# Altium PCB Ajchel_Jakub_plytka_gnd.PcbDoc
Units mm, origin at the board's own origin, x right, y up, seen from the top; angles counter-clockwise.
Board outline 81 x 76 mm, 2 copper layers (Top Layer, Bottom Layer); 80 components, 39 nets, 216 pads, 66 vias.
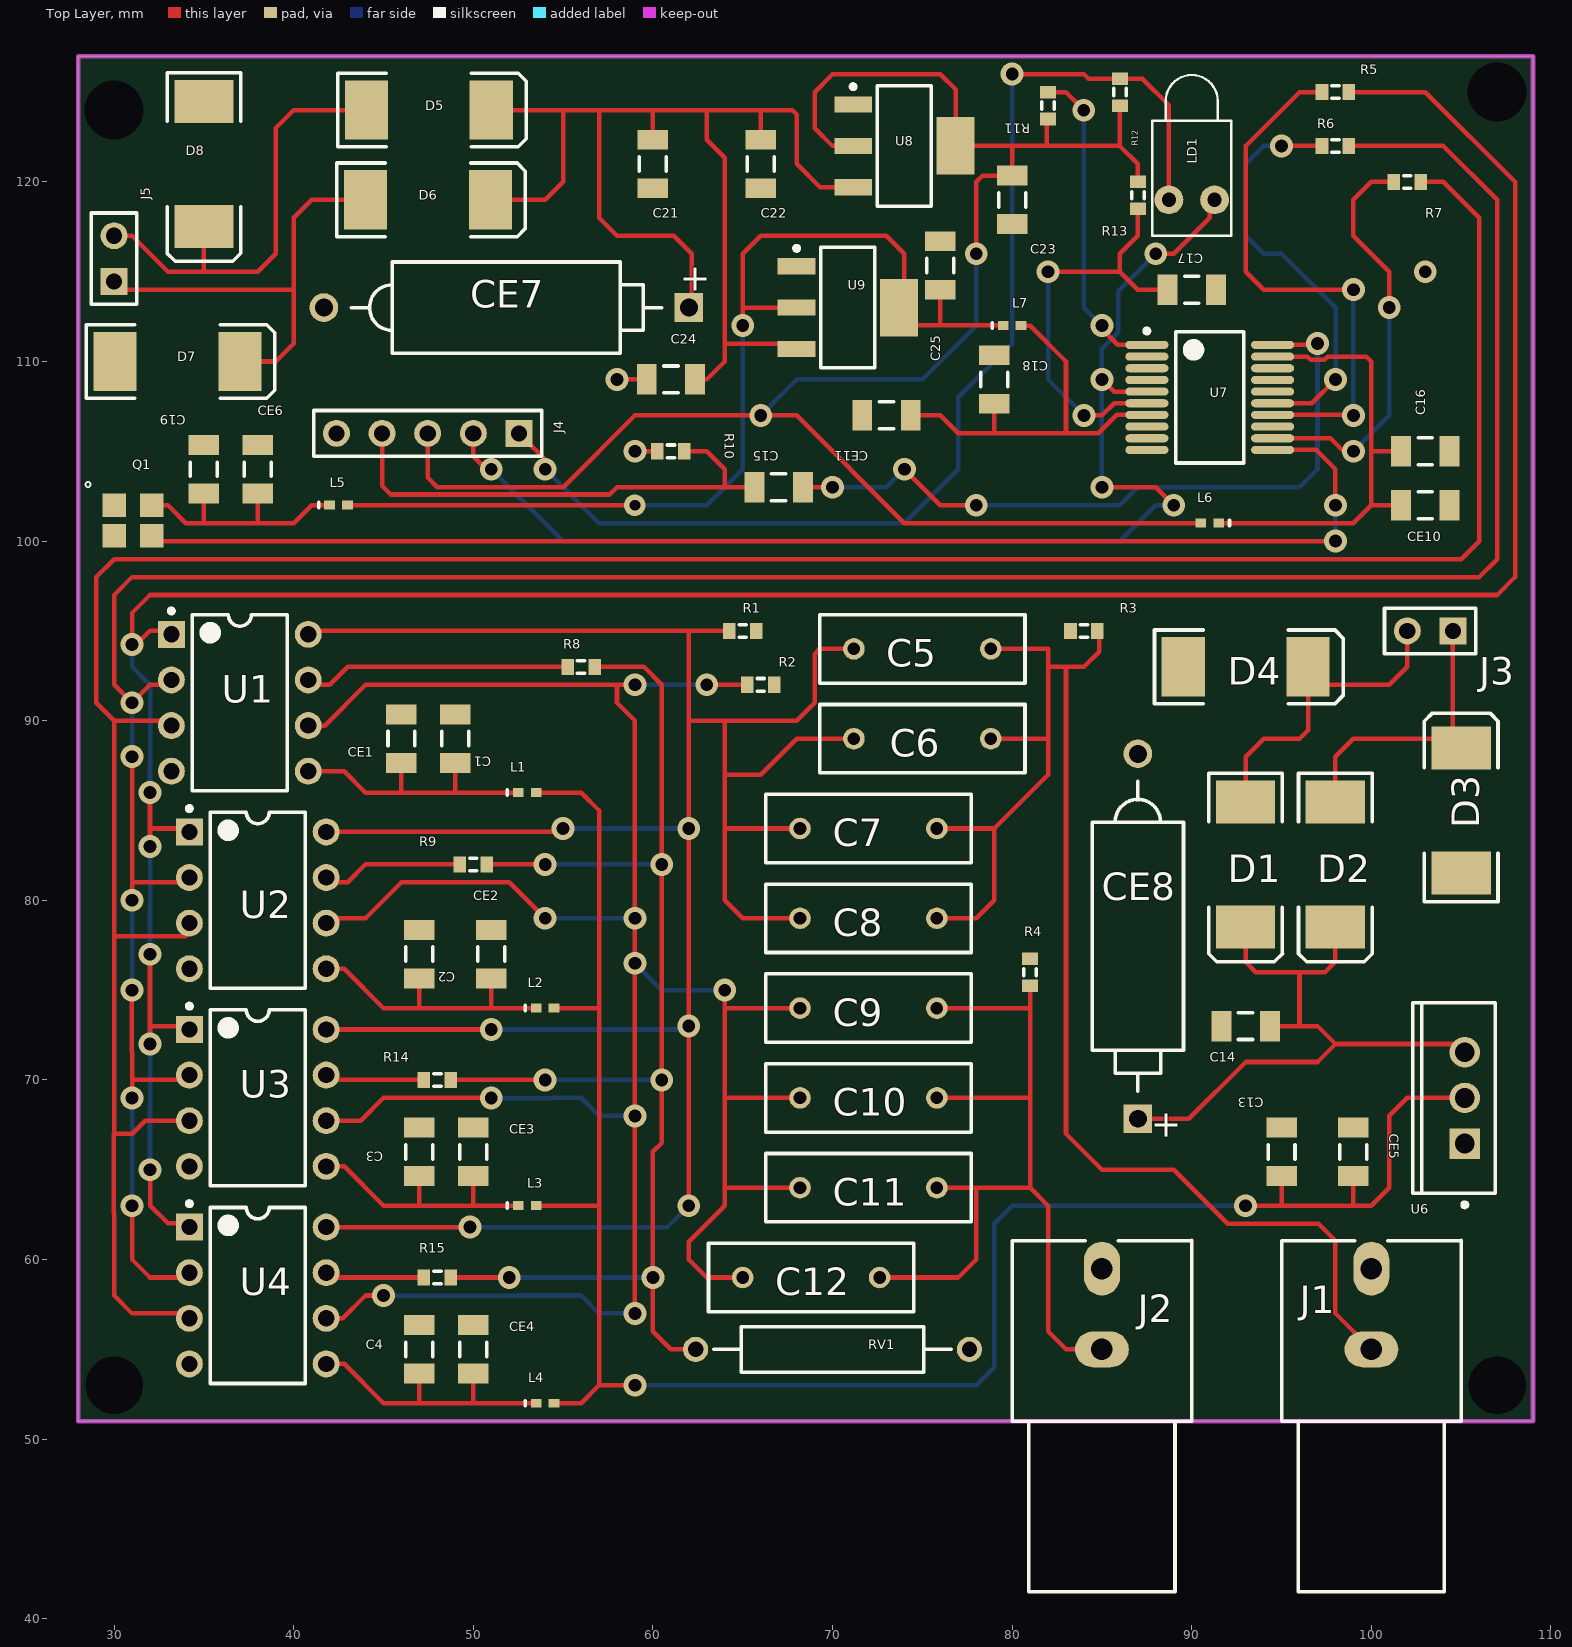
[diagram p0: Top Layer view]
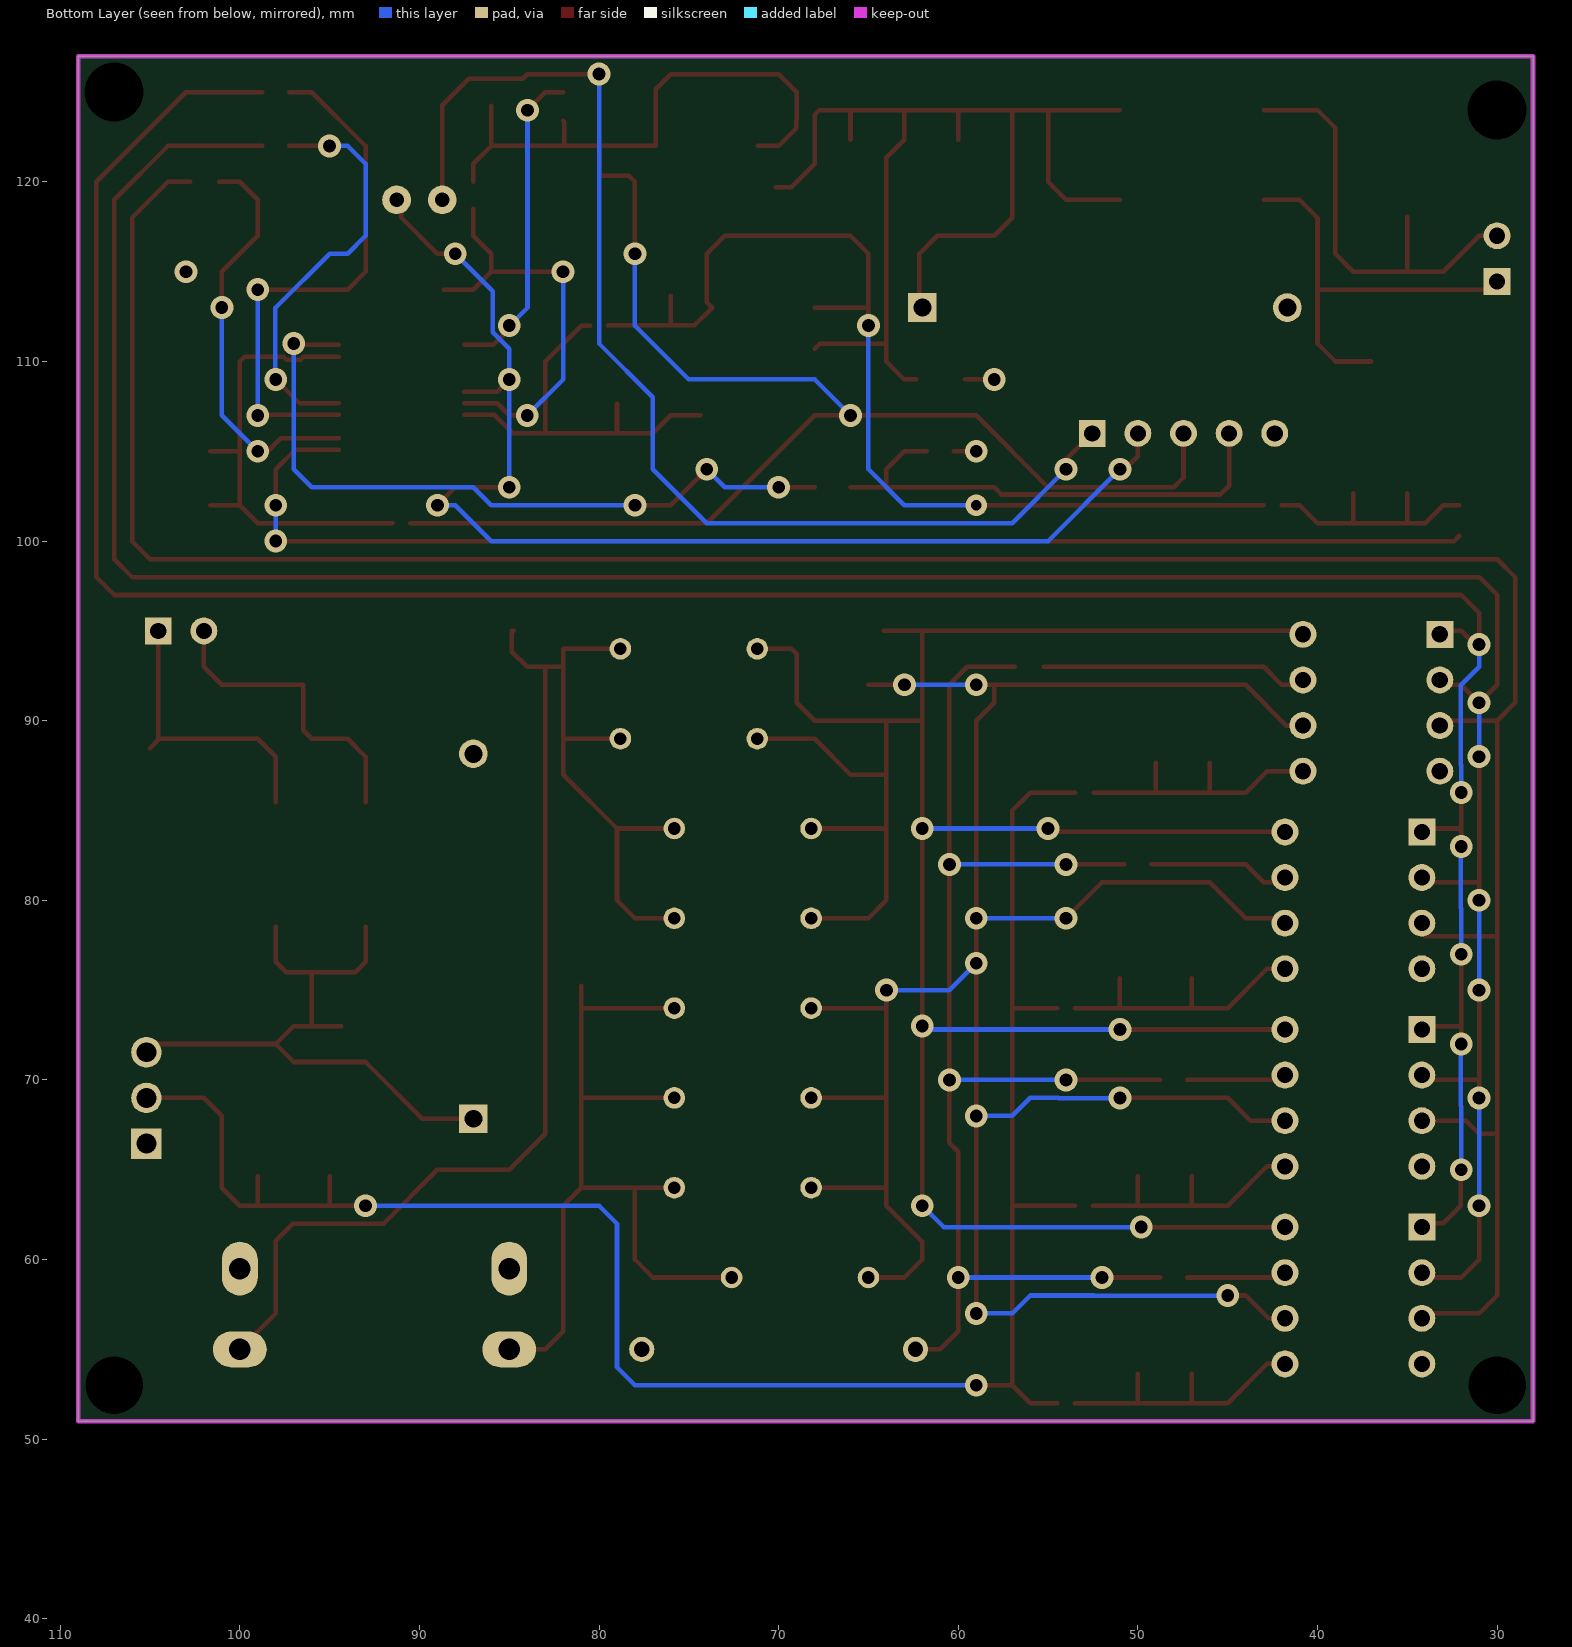
[diagram p1: Bottom Layer view, seen from below]

## Layer stack, top to bottom
Top Solder: solder mask 0.0102, Solder Resist, Dk 3.5
Top Layer: signal copper 0.0356
Dielectric 1: dielectric 0.32, FR-4, Dk 4.8
Bottom Layer: signal copper 0.0356
Bottom Solder: solder mask 0.0102, Solder Resist, Dk 3.5

## Board outline
28,51 28,127 109,127 109,51

## Design rules (kind name [scope] priority, off if disabled: settings)
Clearance [All] p1: gap=0.152 ignorepadtopadclearanceinfootprint=FALSE
HoleSize [All] p1: absolutevalues=TRUE maxlimit=10 minlimit=0.025 maxpercent=80.000 minpercent=20.000
MinimumSolderMaskSliver [All] p1: minsoldermaskwidth=0.051
PolygonConnect [All] p1: connectstyle=Relief reliefconductorwidth=0.254 reliefentries=4 polygonreliefangle="90 Angle" airgapwidth=0.254
RoutingVias [All] p1: holewidth=0.711 width=1.27 viastyle="Through Hole" minholewidth=0.711 minwidth=1.27 maxholewidth=0.711 maxwidth=1.27
SilkToSilkClearance [All] p1: silktosilkclearance=0
SilkToSolderMaskClearance [IsPad] p1: minsilkscreentomaskgap=0.025 clearancetoexposedcopper=TRUE
SolderMaskExpansion [All] p1: expansion=0
Width [All] p1: maxlimit=0.254 minlimit=0.254 preferedwidth=0.254
26 further rules are at their usual default settings.

## Components (designator, comment, footprint, x,y, rotation, side; value= is the part's Value field where it differs from the comment)
C1 "Comment" C1206 49,89 r270 top value=100nF
C2 "Comment" C1206 47,77 r270 top value=100nF
C3 "Comment" C1206 47,66 r270 top value=100nF
C4 "Comment" C1206 47,55 r270 top value=100nF
C5 "Comment" RAD-0.3 75,94 r0 top value=3.3uF
C6 "Comment" RAD-0.3 75,89 r0 top value=3.3uF
C7 "Comment" RAD-0.3 72,84 r0 top value=3.3uF
C8 "Comment" RAD-0.3 72,79 r0 top value=3.3uF
C9 "Comment" RAD-0.3 72,74 r0 top value=3.3uF
C10 "Comment" RAD-0.3 72,69 r0 top value=3.3uF
C11 "Comment" RAD-0.3 72,64 r0 top value=3.3uF
C12 "Comment" RAD-0.3 68.81,59 r0 top value=3.3uF
C13 "Comment" C1206 95,66 r270 top value=100nF
C14 "Comment" C1206 93,73 r0 top value=100nF
C15 "Comment" C1206 67,103 r180 top value=100nF
C16 "Comment" C1206 103,105 r180 top value=100nF
C17 "Comment" C1206 90,114 r180 top value=100nF
C18 "Comment" C1206 79,109 r270 top value=100nF
C19 "Comment" C1206 35,104 r270 top value=100nF
C21 "Comment" C1206 60,121 r90 top value=100nF
C22 "Comment" C1206 66,121 r90 top value=10uF
C23 "Comment" C1206 80,119 r90 top value=10uF
C24 "Comment" C1206 61,109 r0 top value=10uF
C25 "Comment" C1206 76,115.35 r270 top value=10uF
CE1 "Comment" C1206 46,89 r90 top value=10uF
CE2 "Comment" C1206 51,77 r90 top value=10uF
CE3 "Comment" C1206 50,66 r90 top value=10uF
CE4 "Comment" C1206 50,55 r90 top value=10uF
CE5 "Comment" C1206 99,66 r90 top value=10uF
CE6 "Comment" C1206 38,104 r90 top value=10uF
CE7 "Comment" POLAR0.8 51.84,113 r0 top value=1mF
CE8 "Comment" POLAR0.8 87,78 r270 top value=2.2mF
CE10 "Comment" C1206 103,102 r0 top value=10uF
CE11 "Comment" C1206 73,107 r180 top value=10uF
D1 "Comment" SMC 92.995,82 r270 top
D2 "Comment" SMC 97.995,82 r270 top
D3 "Comment" SMC 105,85 r90 top
D4 "Comment" SMC 93,93 r0 top
D5 "Comment" SMC 47.525,124 r0 top
D6 "Comment" SMC 47.475,119 r0 top
D7 "Comment" SMC 33.525,110 r0 top
D8 "Comment" SMC 35,121 r270 top
J1 "Comment" RCA/4.5-H2 100,51 r270 top
J2 "Comment" RCA/4.5-H2 85,51 r270 top
J3 "Comment" HDR1X2 104.54,95 r180 top
J4 "Comment" HDR1X5 52.54,106 r180 top
J5 "Comment" HDR1X2 30,114.46 r90 top
L1 "Comment" 0402-A 53,86 r0 top value=1uH
L2 "Comment" 0402-A 54,74 r0 top value=1uH
L3 "Comment" 0402-A 53,63 r0 top value=1uH
L4 "Comment" 0402-A 54,52 r0 top value=1uH
L5 "Comment" 0402-A 42.5,102 r0 top value=1uH
L6 "Comment" 0402-A 91,101 r180 top value=1uH
L7 "Comment" 0402-A 80,112 r0 top value=1uH
LD1 "Comment" LED-1 90,119 r90 top
Q1 "Comment" "CTS 403" 31.05,101.15 r0 top
R1 "Comment" J1-0603 65,95 r0 top value=560
R2 "Comment" J1-0603 66,92 r0 top value=560
R3 "Comment" J1-0603 84,95 r0 top value=220K
R4 "Comment" J1-0603 81,76 r270 top value=220K
R5 "Comment" J1-0603 98,125 r0 top value=33
R6 "Comment" J1-0603 98,122 r0 top value=33
R7 "Comment" J1-0603 102,120 r0 top value=33
R8 "Comment" J1-0603 56,93 r0 top value=10
R9 "Comment" J1-0603 50,82 r0 top value=10
R10 "Comment" J1-0603 61,105 r0 top value=75
R11 "Comment" J1-0603 82,124.25 r270 top value=10K
R12 "Comment" J1-0603 86,125 r270 top value=1K
R13 "Comment" J1-0603 87,119.25 r90 top value=10K
R14 "Comment" J1-0603 48,70 r0 top value=10
R15 "Comment" J1-0603 48,59 r0 top value=10
RV1 "Comment" AXIAL-0.6 70,55 r180 top value=2.2K
U1 "Comment" DIP8 37,91 r0 top
U2 "Comment" DIP8 38,80 r0 top
U3 "Comment" DIP8 38,69 r0 top
U4 "Comment" DIP8 38,58 r0 top
U6 "Comment" LT-T-3 105.2,69 r180 top
U7 "Comment" SSOP20_M 91,108 r0 top
U8 "Comment" MP04A_L 74,122 r0 top
U9 "Comment" MP04A_L 70.85,113 r0 top

## Footprints (in the part's own frame and the unit in brackets; to place one, negate y for a bottom-side part, rotate by r counter-clockwise, add the part's x,y. Pads: shape width x height; smd on the part's side, far side on the other; paste and mask are expansions set on the pad)
0402-A [mm] "Chip Inductor, Body 1.0x0.5mm, IPC High Density"
  rect 0.6x0.5 smd: 1(-0.5,0) 2(0.5,0)
  silkscreen extent -1.1,-0.15 -1.1,0.15, body extent -0.55,-0.3 0.55,0.3, height 0.55
AXIAL-0.6 [mm] "Axial Device, Thru-Hole; 2 Leads; 0.6 in Pin Spacing"
  round 1.4 hole 0.85: 1(-7.62,0) 2(7.62,0)
  silkscreen extent -6.6,-1.27 6.6,1.27
C1206 [mm] "Chip Capacitor, Body 3.2x1.6mm, IPC High Density"
  rect 1.1x1.7 smd: 1(-1.35,0) 2(1.35,0)
  silkscreen extent -0.4,-0.75 0.4,0.75, body extent -1.7,-0.9 1.7,0.9, height 1.3
"CTS 403" [mm]
  rect 1.3x1.3 smd: 1(-1.05,0.85) 2(-1.05,-0.85) 3(1.05,-0.85) 4(1.05,0.85)
  silkscreen extent -2.64,1.86 -2.36,2.14, body extent -1.6,-1.25 1.6,1.25, height 0.77
DIP8 [mm] "DIP, 8-Leads, Row Spacing 7.62mm, Pitch 2.54mm, Body 9.33x6.35mm"
  rect 1.5x1.5 hole 0.9: 1(-3.81,3.81)
  round 1.5 hole 0.9: 2(-3.81,1.27) 3(-3.81,-1.27) 4(-3.81,-3.81) 5(3.81,-3.81) 6(3.81,-1.27) 7(3.81,1.27) 8(3.81,3.81)
  silkscreen extent -3.93,-4.9 2.65,5.23, body extent -3.3,-4.9 3.3,4.9, height 5.08
HDR1X2 [mm] "Connector; Header; 2 Position"
  rect 1.5x1.5 hole 0.9: 1(0,0)
  round 1.5 hole 0.9: 2(2.54,0)
  silkscreen extent -1.27,-1.27 3.81,1.27
HDR1X5 [mm] "Connector; Header; 5 Position"
  rect 1.5x1.5 hole 0.9: 1(0,0)
  round 1.5 hole 0.9: 2(2.54,0) 3(5.08,0) 4(7.62,0) 5(10.16,0)
  silkscreen extent -1.27,-1.27 11.43,1.27
J1-0603 [mm] "Chip Resistor, Body 1.6x0.8mm, IPC High Density"
  rect 0.7x0.9 smd: 1(-0.75,0) 2(0.75,0)
  silkscreen extent -0.2,-0.35 0.2,0.35, body extent -0.85,-0.48 0.85,0.48, height 0.9
LED-1 [mm] "LED; 2 Leads"
  round 1.6 hole 0.8: 1(0,1.27) 2(0,-1.27)
  silkscreen extent -2,-2.2 6.95,2.2
LT-T-3 [mm] "T, 3-Leads, Body 10.55x4.6mm, Pitch 2.54mm"
  rect 1.7x1.7 hole 1.1: 1(0,2.54)
  round 1.7 hole 1.1: 2(0,0) 3(0,-2.54)
  silkscreen extent -1.7,-5.3 2.9,6.07, body extent -1.7,-5.28 2.9,5.28, height 22.15
MP04A_L [mm] "SOT223, 4-Leads, Body 6.5x3.5mm, Pitch 2.3mm, Lead Span 7mm, IPC High Density"
  rect 2.1x0.9 smd: 1(-2.85,2.3) 2(-2.85,0) 3(-2.85,-2.3)
  rect 2.1x3.2 smd: 4(2.85,0)
  silkscreen extent -2.97,-3.35 1.5,3.42, body extent -1.86,-3.35 1.86,3.35, height 1.8
POLAR0.8 [mm] "Polarized Capacitor; 2 Leads"
  rect 1.6x1.6 hole 1: 1(10.16,0)
  round 1.6 hole 1: 2(-10.16,0)
  silkscreen extent -8.64,-2.54 8.64,2.54
RAD-0.3 [mm] "Radial Cap, Thru-Hole; 2 Leads; 0.3 in Pin Spacing"
  round 1.2 hole 0.7: 1(-3.81,0) 2(3.81,0)
  silkscreen extent -5.71,-1.91 5.71,1.91
RCA/4.5-H2 [mm] "Two Conductor Jack (RCA), Right Angle, Thru-Hole, Body 10 x 10 x 13 mm (WxTxH)"
  oval 2x3 hole 1.2: 1A(-4,0)
  oval 3x2 hole 1.2: 2B(-8.496,0)
  silkscreen extent -10.07,-5 9.5,5
SMC [mm] "DO-214-AB/SMC; 2 C-Bend Leads; Body 7.9 x 5.9 mm, inc. leads (LxW)"
  rect 2.4x3.3 smd: 1(-3.475,0) 2(3.475,0)
  silkscreen extent -5.07,-2.05 5.43,2.05
SSOP20_M [mm] "SOP, 20-Leads, Body 7.2x5.29mm, Pitch 0.65mm, IPC Low Density"
  oval 2.4x0.45 smd: 1(-3.5,2.925) 2(-3.5,2.275) 3(-3.5,1.625) 4(-3.5,0.975) 5(-3.5,0.325) 6(-3.5,-0.325) 7(-3.5,-0.975) 8(-3.5,-1.625) 9(-3.5,-2.275) 10(-3.5,-2.925) 11(3.5,-2.925) 12(3.5,-2.275) 13(3.5,-1.625) 14(3.5,-0.975) 15(3.5,-0.325) 16(3.5,0.325) 17(3.5,0.975) 18(3.5,1.625) 19(3.5,2.275) 20(3.5,2.925)
  silkscreen extent -3.62,-3.65 1.9,3.82, body extent -2.69,-3.66 2.69,3.67, height 1.98

## Part data
C1 C2 C3 C4 C5 C6 C7 C8 C9 C10 C11 C12 C13 C14 C15 C16 C17 C18 C19 C21 C22 C23 C24 C25: library part Cap, "Capacitor", LatestRevisionDate=17-Jul-2002, LatestRevisionNote="Re-released for DXP Platform.", PackageDescription="Radial Cap, Thru-Hole; 2 Leads; 0.3 in Pin Spacing", PackageReference=RAD-0.3, Published=8-Jun-2000, Publisher="Altium Limited"
CE1 CE2 CE3 CE4 CE5 CE6 CE7 CE8 CE10 CE11: library part "Cap Pol2", "Polarized Capacitor (Axial)", LatestRevisionDate=17-Jul-2002, LatestRevisionNote="Re-released for DXP Platform.", PackageDescription="Polarized Capacitor; 2 Leads", PackageReference=POLAR0.8, Published=8-Jun-2000, Publisher="Altium Limited"
D1 D2 D3 D4 D5 D6 D7 D8: library part D-AK-2
J1 J2: library part RCA, "RCA Phono Jack, Right Angle, Thru-Hole, Snap-In", PackageDocument=7-Jul-2000, ComponentLink1Description="Manufacturer Link", ComponentLink1URL=http://www.mouser.com/kobiconn/, DatasheetDocument=7-Jul-2000, DrillAndSlotSize="Corresponds to nominal value.", LatestRevisionDate=15-Jul-2004, LatestRevisionNote="Component Replaced.", PackageReference=161, PCB_Layout="Complies with manufacturer's recommendation.", Published=15-Jul-2004, Publisher="Altium Limited"
J3 J5: library part "Header 2", "Header, 2-Pin", LatestRevisionDate=17-Jul-2002, LatestRevisionNote="Re-released for DXP Platform.", Publisher="Altium Limited"
J4: library part "Header 5", "Header, 5-Pin", LatestRevisionDate=17-Jul-2002, LatestRevisionNote="Re-released for DXP Platform.", Publisher="Altium Limited"
L1 L2 L3 L4 L5 L6 L7: library part Inductor, "Inductor", Code_IEC=1005, Code_JEITA=0402, LatestRevisionDate=29-May-2009, LatestRevisionNote="IPC-7351 Footprint Added.", PackageDescription="Chip Inductor", PackageReference=0402-A, Published=8-Jun-2000, Publisher="Altium Limited"
LD1: library part LED1, "Typical RED GaAs LED", LatestRevisionDate=08-Jul-2005, LatestRevisionNote="Mech Layer 1 removed.", PackageDescription="LED; 2 Leads", PackageReference=LED-1, Published=8-Jun-2000, Publisher="Altium Limited"
Q1: library part Oscilator12mhz, "Oscilator 12MHz", Supplier Part Number 1=1276649RL, HelpURL=https://www.tme.eu/pl/Document/96c4d9b8a8fd6040d2a0173ba011486f/cfps-39.pdf, Supplier 1=Farnell
R1 R2 R3 R4 R5 R6 R7 R8 R9 R10 R11 R12 R13 R14 R15: library part Res2, "Resistor", LatestRevisionDate=17-Jul-2002, LatestRevisionNote="Re-released for DXP Platform.", PackageDescription="Axial Device, Thru-Hole; 2 Leads; 0.4 in Pin Spacing", PackageReference=AXIAL-0.4, Published=8-Jun-2000, Publisher="Altium Limited"
RV1: library part "Res Adj2", "Variable Resistor", LatestRevisionDate=17-Jul-2002, LatestRevisionNote="Re-released for DXP Platform.", PackageDescription="Axial Device, Thru-Hole; 2 Leads; 0.6 in Pin Spacing", PackageReference=AXIAL-0.6, Published=8-Jun-2000, Publisher="Altium Limited", Set Position=0.5
U1 U2 U3 U4: library part TDA1543, "TDA1543"
U6: library part LT-LT1086-T-3
U7: library part WM8804
U8 U9: library part PM-REG-LM1086ADJ-SOT4

## Free pads (board coordinates)
  round 1.524 hole 3.3 unplated: 1(30,124) 4(107,125)
  round 1.524 hole 3.2 unplated: 2(30,53) 3(107,53)

## Via types
v1: diameter 1.27, hole 0.711, Top Layer to Bottom Layer, 65 vias
v2: diameter 1.2, hole 0.6, Top Layer to Bottom Layer, 1 vias

## Nets (pads, with @x,y where several pads share a name; then routed paths per layer and width w, separated by ;. In a path a pad name is that pad's centre, name@x,y a point inside that pad or via, vN(x,y) a via of type N, cw(c..) or ccw(c..) an arc to the next point about the centre after c; other vN are vias at no path point)
BCLK: R5.1 U7.14 | length 30.4
  Top Layer w0.254: U7.14 v1@99,107.025 ; R5.1 96,125 93,122 93,115 94,114 v1(99,114)
  Bottom Layer w0.254: v1(99,107) v1(99,114)
DOUT: R7.1 U7.12 | length 23
  Top Layer w0.254: U7.12 97.725,105.725 98.45,105 v1(99,105) ; v1(101,113) 101,115 99,117 99,119 100,120 R7.1@101.15,120
  Bottom Layer w0.254: v1(99,105) 101,107 v1(101,113)
GND: C1.1 C2.1 C3.1 C4.1 C13.1 C14.1 C16.1 C17.1 C18.1 C19.1 C21.1 C22.1 C23.1 C24.1 C25.1 CE1.2 CE2.2 CE3.2 CE4.2 CE5.2 CE6.2 CE7.2 CE8.2 CE10.2 CE11.2 D3.1 D4.1 D7.1 D8.1 J1.2B J2.2B J4.5 Q1.2 R1.2 R2.2 R3.1 R4.1 R10.1 RV1.1 U1.4 U2.4 U3.4 U4.4 U6.1 U7.2 U7.3 U7.4 U7.8 U8.1 U9.1 | length 2.9
  Top Layer w0.254: v1(58,109) C24.1 ; v1(59,105) 60.15,105 R10.1
LCA: J4.1 LD1.1 R12.1 | length 66.3
  Top Layer w0.254: J4.1 54.27,104.27 v1(54,104) ; v1(80,126) 84,126 84.25,125.75 R12.1 87.25,125.75 88.73,124.27 LD1.1
  Bottom Layer w0.254: v1(54,104) 57,101 74,101 77,104 77,108 80,111 v1(80,126)
LCK: J4.2 LD1.2 U7.5 | length 69.2
  Top Layer w0.254: J4.2 50,104.73 v1@50.73,104 ; v1(85,103) 88,103 v1(89,102) ; v1(85,109) 85.675,108.325 U7.5 ; v1(88,116) 89,116 91,118 91,118.73 LD1.2
  Bottom Layer w0.254: v1(51,104) 55,100 86,100 88,102 v1(89,102) ; v1(85,103) v1(85,109) 85,110.707 85.914,111.621 85.914,113.914 v1(88,116)
LRCK: R6.1 U7.15 | length 23.4
  Top Layer w0.254: U7.15 96.675,107.675 v1(98,109) ; v1(95,122) R6.1
  Bottom Layer w0.254: v1(95,122) 94,122 93,121 93,117 94,116 95,116 98.016,112.984 98.016,109.016 v1(98,109)
NetC1_2: C1.2 CE1.1 L1.1 U1.5 | length 17
  Top Layer w0.254: U1.5 42.81,87.19 44,86 50,86 51,86 L1.1@52.45,86 ; 46,86 CE1.1 ; 46.438,86 48,86 ; 49,86 C1.2
NetC2_2: C2.2 CE2.1 L2.1 U2.5 | length 15.9
  Top Layer w0.254: U2.5 42.81,76.19 45,74 47,74 ; C2.2 47,74 ; CE2.1 51,74 ; L2.1 51,74 ; 47,74 51,74
NetC3_2: C3.2 CE3.1 L3.1 U3.5 | length 14.9
  Top Layer w0.254: U3.5 42.81,65.19 45,63 47,63 ; C3.2 47,63 ; CE3.1 50,63 ; L3.1 50,63 ; 47,63 50,63
NetC4_2: C4.2 CE4.1 L4.1 U4.5 | length 15.9
  Top Layer w0.254: U4.5 42.81,54.19 45,52 47,52 ; C4.2 47,52 ; CE4.1 50,52 ; L4.1 50,52 ; 47,52 50,52
NetC5_1: C5.1 C6.1 C7.1 C8.1 R1.1 U1.8 U2.8 U3.8 U4.8 | length 156.3
  Top Layer w0.254: U1.8@41,95 R1.1@64.15,95 ; U4.8 v1(49.81,61.81) ; U3.8 v1(51,72.81) ; U2.8 v1@54.81,83.81 ; v1(62,63) v1(62,73) v1(62,84) 62,89 62,90 ; 62,95 62,94 62,90 ; 64,85 64,86 ; C8.1@67.851,79 C8.1 ; C8.1@68.021,79 65,79 64,80 64,81 64,82 64,83 64,84 ; C7.1 64,84 ; C6.1 68,89 66,87 64,87 ; C5.1 69.285,94 69,93.715 69,91 68,90 64,90 ; 62,90 64,90 ; 64,84 64,87 ; 64,87 64,89 64,90
  Bottom Layer w0.254: v1(49.81,61.81) 60.81,61.81 v1(62,63) ; v1(51,72.81) v1@61.81,72.81 ; v1(55,84) v1(62,84)
NetC5_2: C5.2 C6.2 C7.2 C8.2 J1.1A R3.2 | length 83.2
  Top Layer w0.254: C8.2 78,79 79,80 79,84 ; C7.2 79,84 ; C6.2 82,89 ; C5.2 82,94 82,92 82,89 ; 82,93 83,93 ; R3.2 84.85,95 84.85,93.85 84,93 83,93 ; J1.1A 98,57 98,61.057 97.057,62 92,62 89,65 85,65 83,67 83,93 ; 79,84 82,87 82,89
NetC9_1: C9.1 C10.1 C11.1 C12.1 R2.1 U1.6 U2.6 U3.6 U4.6 | length 157.7
  Top Layer w0.254: U1.6 41.73,89.73 44,92 46,92 58,92 ; U4.6 42.73,56.73 44,58 v1(45,58) ; U3.6 43.73,67.73 45,69 v1(51,69) ; U2.6@42.08,79 44,79 46,81 52,81 v1(54,79) ; v1(59,57) v1(59,68) v1(59,76.5) v1(59,79) 59,90 58.5,90.5 58,91 58,92 ; v1(59,92) 58,92 ; v1(63,92) R2.1@65,92 ; 64,65 64,68 ; 64,70 64,72 ; v1(64,75) 64,74 ; C12.1 63,59 62,60 62,61 64,63 64,64 ; C9.1@68,74 64,74 ; C11.1 64,64 ; C10.1 64,69 ; 64,64 64,69 ; 64,69 64,74
  Bottom Layer w0.254: v1(45,58) 45.016,57.984 52.421,57.984 52.437,58 56,58 57,57 v1(59,57) ; v1(51,69) 51.016,68.984 54.421,68.984 54.437,69 56,69 57,68 v1(59,68) ; v1(54,79) v1(59,79) ; v1(59,76.5) 60.5,75 v1(64,75) ; v1(59,92) v1(63,92)
NetC9_2: C9.2 C10.2 C11.2 C12.2 J2.1A R4.2 | length 48.4
  Top Layer w0.254: C12.2 77,59 78,60 78,64 ; C11.2 78,64 ; C10.2 81,69 ; C9.2 81,74 ; R4.2 81,74.8 81,74 ; J2.1A 83,55 82,56 82,63 81,64 ; 78,64 81,64 ; 81,64 81,69 ; 81,69 81,74
NetC13_2: C13.2 CE5.1 L1.2 L2.2 L3.2 L4.2 U6.2 | length 110
  Top Layer w0.254: L3.2 57,63 ; L1.2 56,86 57,85 57,74 ; L4.2 56,52 57,53 ; L2.2 57,74 ; v1(59,53) 58,53 57,53 ; v1(93,63) 95,63 ; C13.2 95,63 ; CE5.1 99,63 ; U6.2 102,69 101,68 101,64 100,63 99,63 ; 57,53 57,63 ; 57,63 57,74 ; 95,63 99,63
  Bottom Layer w0.254: v1(59,53) 78,53 79,54 79,62 80,63 v1(93,63)
NetC14_2: C14.2 CE8.1 D1.2 D2.2 U6.3 | length 36.6
  Top Layer w0.254: CE8.1 89.84,67.84 93,71 97,71 98,72 ; D1.2 92.995,76.575 93.57,76 96,76 ; C14.2 96,73 ; D2.2 97.995,76.575 97.42,76 97,76 96,76 ; U6.3 104.74,72 98,72 ; 96,73 97,73 98,72 ; 96,73 96,76
NetC15_1: C15.1 U7.20 | length 40.3
  Top Layer w0.254: C15.1@68,103 v1@69.65,103 ; v1(74,104) 76,102 v1(78,102) ; U7.20 96.925,110.925 v1(97,111)
  Bottom Layer w0.254: v1(70,103) 73,103 v1(74,104) ; v1(78,102) 86,102 87,103 96,103 97,104 v1(97,111)
NetC15_2: C15.2 J4.4 R10.2 | length 28
  Top Layer w0.254: J4.4 44.92,103.08 45.406,102.594 57.594,102.594 58,103 64,103 ; R10.2 63,105 64,104 64,103 ; C15.2@66,103 C15.2 64,103
NetC16_2: C16.2 CE10.1 L6.1 U7.19 | length 26
  Top Layer w0.254: L6.1 99,101 100,102 ; U7.19 96.432,110.275 96.621,110.086 97.379,110.086 97.568,110.275 99.725,110.275 100,110 100,105 ; CE10.1 100,102 ; C16.2 100,105 ; 100,102 100,105
NetC17_2: C17.2 R13.1 U7.6 | length 23.6
  Top Layer w0.254: v1(82,115) 86,115 ; v1(84,107) 85,107 85.675,107.675 U7.6 ; R13.1 87,117 86,116 86,115 ; C17.2 87,114 86,115
  Bottom Layer w0.254: v1(82,115) 82,109 v1(84,107)
NetC18_2: C18.2 CE11.1 L7.2 U7.7 | length 23
  Top Layer w0.254: CE11.1 76,107 77,106 79,106 ; C18.2 79,106 ; L7.2 81,112 83,110 83,106 ; U7.7 85.825,107.025 84.8,106 83,106 ; 79,106 83,106
NetC19_2: C19.2 CE6.1 L5.1 Q1.4 | length 14
  Top Layer w0.254: Q1.4 33,102 34,101 35,101 ; C19.2 35,101 ; CE6.1 38,101 ; L5.1 41,102 40,101 38,101 ; 35,101 38,101
NetC21_2: C21.2 C22.2 C24.2 CE7.1 D5.2 D6.2 U8.3 U9.3 | length 69.8
  Top Layer w0.254: D6.2@51,119 54,119 55,120 55,123 55,124 ; D5.2 55,124 ; C21.2 60,124 ; CE7.1@62.16,113 62.16,116 61.16,117 58,117 57,118 57,124 ; C24.2 63,109 64,110 64,111 ; 63,124 63,122.35 64,121.35 64,111 ; C22.2 66,124 ; U9.3 67.7,111 64,111 ; U8.3@70.15,119.7 69.3,119.7 68,121 68,123.75 67.75,124 66,124 ; 55,124 57,124 ; 57,124 60,124 ; 60,124 64,124 65,124 66,124
NetD1_1: D1.1 D4.2 J3.2 | length 17.1
  Top Layer w0.254: D1.1 93,85.48 93,88 94,89 96,89 96.475,89.475 96.475,92 101,92 102,93 J3.2
NetD2_1: D2.1 D3.2 J3.1 | length 16.2
  Top Layer w0.254: D2.1 97.995,87.995 99,89 104.475,89 D3.2@104.54,88.935 ; J3.1 D3.2@104.54,88.935 ; D3.2 D3.2@104.54,88.935
NetD5_1: D5.1 D8.2 J5.2 | length 24.7
  Top Layer w0.254: J5.2 31,117 33,115 35,115 ; D8.2@35,118.05 D8.2 35,115 ; D5.1@43,124 40,124 39,123 39,116 38,115 36,115 35,115
NetD6_1: D6.1 D7.2 J5.1 | length 24
  Top Layer w0.254: J5.1 30.46,114 40,114 ; D7.2 39,110 40,111 40,113 40,114 ; D6.1@43,119 41,119 40,118 40,114
NetQ1_3: Q1.3 U7.11 | length 74
  Top Layer w0.254: Q1.3 32.4,100 v1(98,100) ; U7.11 96.925,105.075 98,104 v1(98,102)
  Bottom Layer w0.254: v1(98,100) v1(98,102)
NetR5_2: R5.2 U1.1 U2.1 U3.1 U4.1 | length 153.6
  Top Layer w0.254: v1(32,65) 32.016,64.984 32.016,63 33,62.016 33.984,62.016 U4.1@34,62 ; v1(32,72) 32,73 ; v1(32,83) 32,84 ; v1(32,86) 32,84 ; 32,95 31.25,94.25 31,94 v1(31,94.25) 31,96 32,97 107,97 108,98 108,120 103,125 R5.2 ; v1@32.016,76.984 v1(32,77) 32,73 ; 32.095,95 U1.1@33,95 ; U3.1@34,73 32,73 ; U2.1@34,84 32,84
  Bottom Layer w0.254: v1(31,94.25) 31,93 32.016,91.984 32.016,87.563 32,87.547 v1(32,86) ; v1(32,65) 32,68.547 32.016,68.563 32.016,71.984 v1(32,72) ; v1(32,77) 32,79.547 32.016,79.563 32.016,82.984 v1(32,83)
NetR6_2: R6.2 U1.2 U2.2 U3.2 U4.2 | length 156.6
  Top Layer w0.254: v1(31,63) 31,60 32,59 U4.2@34,59 ; v1(31,69) 31,70 ; v1(31,75) 30.984,74.984 30.984,71.563 31,71.547 31,70 ; v1(31,80) 31,81 ; v1(31,88) 31,81 ; U1.2@33,92 32,92 v1(31,91) 30,92 30,97 31,98 106,98 107,99 107,119 104,122 101,122 R6.2 ; U3.2@34,70 31,70 ; U2.2@34,81 31,81
  Bottom Layer w0.254: v1(31,63) v1(31,69) ; v1(31,75) v1(31,80) ; v1(31,88) v1(31,91)
NetR7_2: R7.2 U1.3 U2.3 U3.3 U4.3 | length 156.9
  Top Layer w0.254: U1.3 32.92,90 31,90 30,90 ; 34,78 30,78 ; U4.3 33.92,57 31,57 30,58 30,62.547 29.984,62.563 29.984,67 ; U3.3 31.73,67.73 31.008,67.008 29.992,67.008 29.984,67 ; R7.2 104,120 106,118 106,100 105,99 30,99 29,98 29,91 30,90 ; 29.984,67 30,67.016 30,78 ; 30,78 30,87 30,90
NetR8_1: R8.1 U1.7 | length 14.7
  Top Layer w0.254: U1.7@41,92 42,92 43,93 50,93 R8.1
NetR8_2: R8.2 R9.2 R14.2 R15.2 RV1.2 | length 75.8
  Top Layer w0.254: R15.2 v1(52,59) ; R14.2 v1(54,70) ; R9.2 v1(54,82) ; R8.2@56.85,93 57.481,93 59.5,93 60.492,92.008 v1(60.492,82) v1(60.492,70) 60.492,66.492 60,66 v1(60,59) 60,56 61,55 RV1.2
  Bottom Layer w0.254: v1(52,59) v1(60,59) ; v1(54,70) v1(60.492,70) ; v1(54,82) v1(60.492,82)
NetR9_1: R9.1 U2.7 | length 7.7
  Top Layer w0.254: U2.7@42,81 43,81 44,82 R9.1
NetR11_1: R11.1 U7.1 | length 17.7
  Top Layer w0.254: R11.1 83,125 83.984,124.016 v1(83.984,123.984) ; v1@85,111.8 85.875,110.925 U7.1
  Bottom Layer w0.254: v1(83.984,123.984) 83.984,113 84.984,112 v1(85,112)
NetR14_1: R14.1 U3.7 | length 5.2
  Top Layer w0.254: U3.7@42,70 44,70 R14.1
NetR15_1: R15.1 U4.7 | length 5.9
  Top Layer w0.254: R15.1 46,59 U4.7@42.08,59 ; U4.7@42.08,59 U4.7 U4.7@42.08,59
V3D: C23.2 J4.3 L6.2 R11.2 R12.2 R13.2 U8.2 U8.4 | length 107.3
  Top Layer w0.254: J4.3 47.46,103.54 48,103 55,103 59,107 v1(66,107) 68,107 74,101 79.147,101 L6.2 ; U8.2 70,122 69.008,122.992 69.008,123.46 69,123.468 69,125 70,126 76,126 76.85,125.15 U8.4 80,122 ; v1(78,116) 78,120 78.35,120.35 C23.2 80,122 ; R11.2@82,123.4 81.93,123.33 81.93,122 ; R12.2 86,122 ; R13.2 87,121 86,122 ; 80,122 81.93,122 ; 81.93,122 86,122
  Bottom Layer w0.254: v1(66,107) 68,109 75,109 78,112 v1(78,116)
V30: C25.2 L5.2 L7.1 U9.2 U9.4 | length 58.6
  Top Layer w0.254: L5.2 v2(59,102) ; v1(65,112) 65,113 ; U9.2 65,113 ; C25.2@76,113.65 76,112.016 ; L7.1 79.484,112.016 76,112.016 ; 65,113 65,116 66,117 73,117 74,116 74,113.3 U9.4 74.684,112.016 76,112.016
  Bottom Layer w0.254: v2(59,102) 63,102 65,104 v1(65,112)
pads on no net: Q1.1 U7.9 U7.10 U7.13 U7.16 U7.17 U7.18
copper on no net:
  other v1: 103,115

## Polygon pours and split planes (outlines as drawn)
GND on Top Layer "Top Layer-GND" (solid, shelved, pour order 18): 28,51 28,127 109,127 109,51
GND on Bottom Layer "Bottom Layer-GND" (solid, shelved, pour order 19): 28,51 28,127 109,127 109,51

## Keep-outs
Keep-Out Layer:
  the board outline again, w0.254

## Other copper
Top Layer:
  region: 79,109
  region: 79,109
  region: 79,109
  region: 79,109
  region: 79,109
  region: 79,109
  region: 79,109
  region: 79,109
  region: 79,109
  region: 79,109
  region: 79,109
  region: 79,109
  region: 79,109
  region: 79,109
  region: 79,109
  region: 79,109
  region: 93,107
  region: 93,107
  region: 93,107
  region: 39,121
  region: 39,121
  region: 39,121

## Text inside footprints (layer, text, board x,y; h text height)
CE7: Top Overlay "+" at 61.492,113.95 h1.5
CE8: Top Overlay "+" at 87.95,68.348 h1.5 r270
J1: Mechanical 1 "PCB Edge" at 95.382,51.333 h0.25; Mechanical 1 "Alert PCB fab to slot details" at 107.842,61.057 h0.3 r270; Mechanical 1 "Slot 1.2x2.2mm, PTH" at 107.342,61.057 h0.3 r270; Mechanical 1 "Assign keep-out area to slot" at 108.342,61.057 h0.3 r270; Mechanical 1 "Mech 1 - Slot cut-out" at 106.842,61.057 h0.3 r270; Mechanical 1 "Mech 2 - Clearance, move to internal plane if present" at 106.342,61.057 h0.3 r270
J2: Mechanical 1 "PCB Edge" at 80.382,51.333 h0.25; Mechanical 1 "Alert PCB fab to slot details" at 92.842,61.057 h0.3 r270; Mechanical 1 "Slot 1.2x2.2mm, PTH" at 92.342,61.057 h0.3 r270; Mechanical 1 "Assign keep-out area to slot" at 93.342,61.057 h0.3 r270; Mechanical 1 "Mech 1 - Slot cut-out" at 91.842,61.057 h0.3 r270; Mechanical 1 "Mech 2 - Clearance, move to internal plane if present" at 91.342,61.057 h0.3 r270